# Allegro board wrsit-shynth.brd
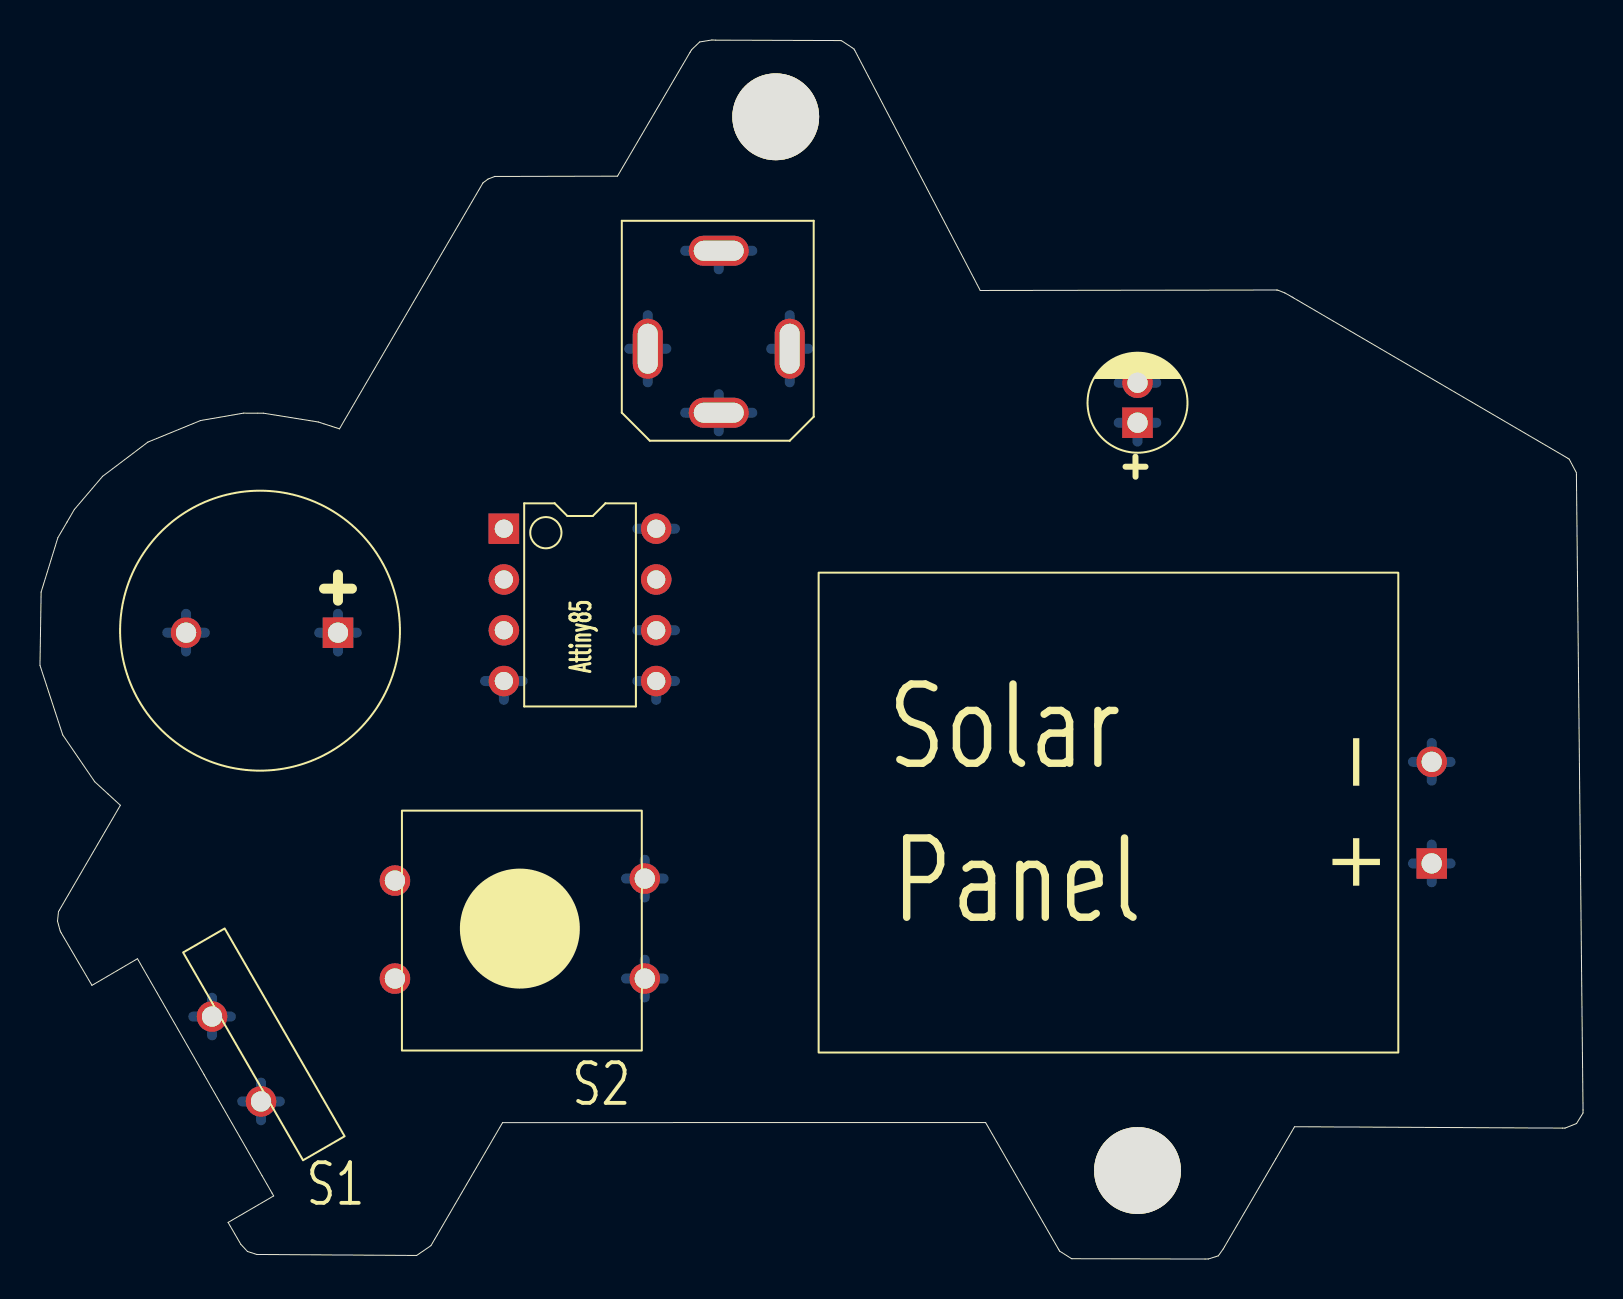
[diagram p0: board, top side]
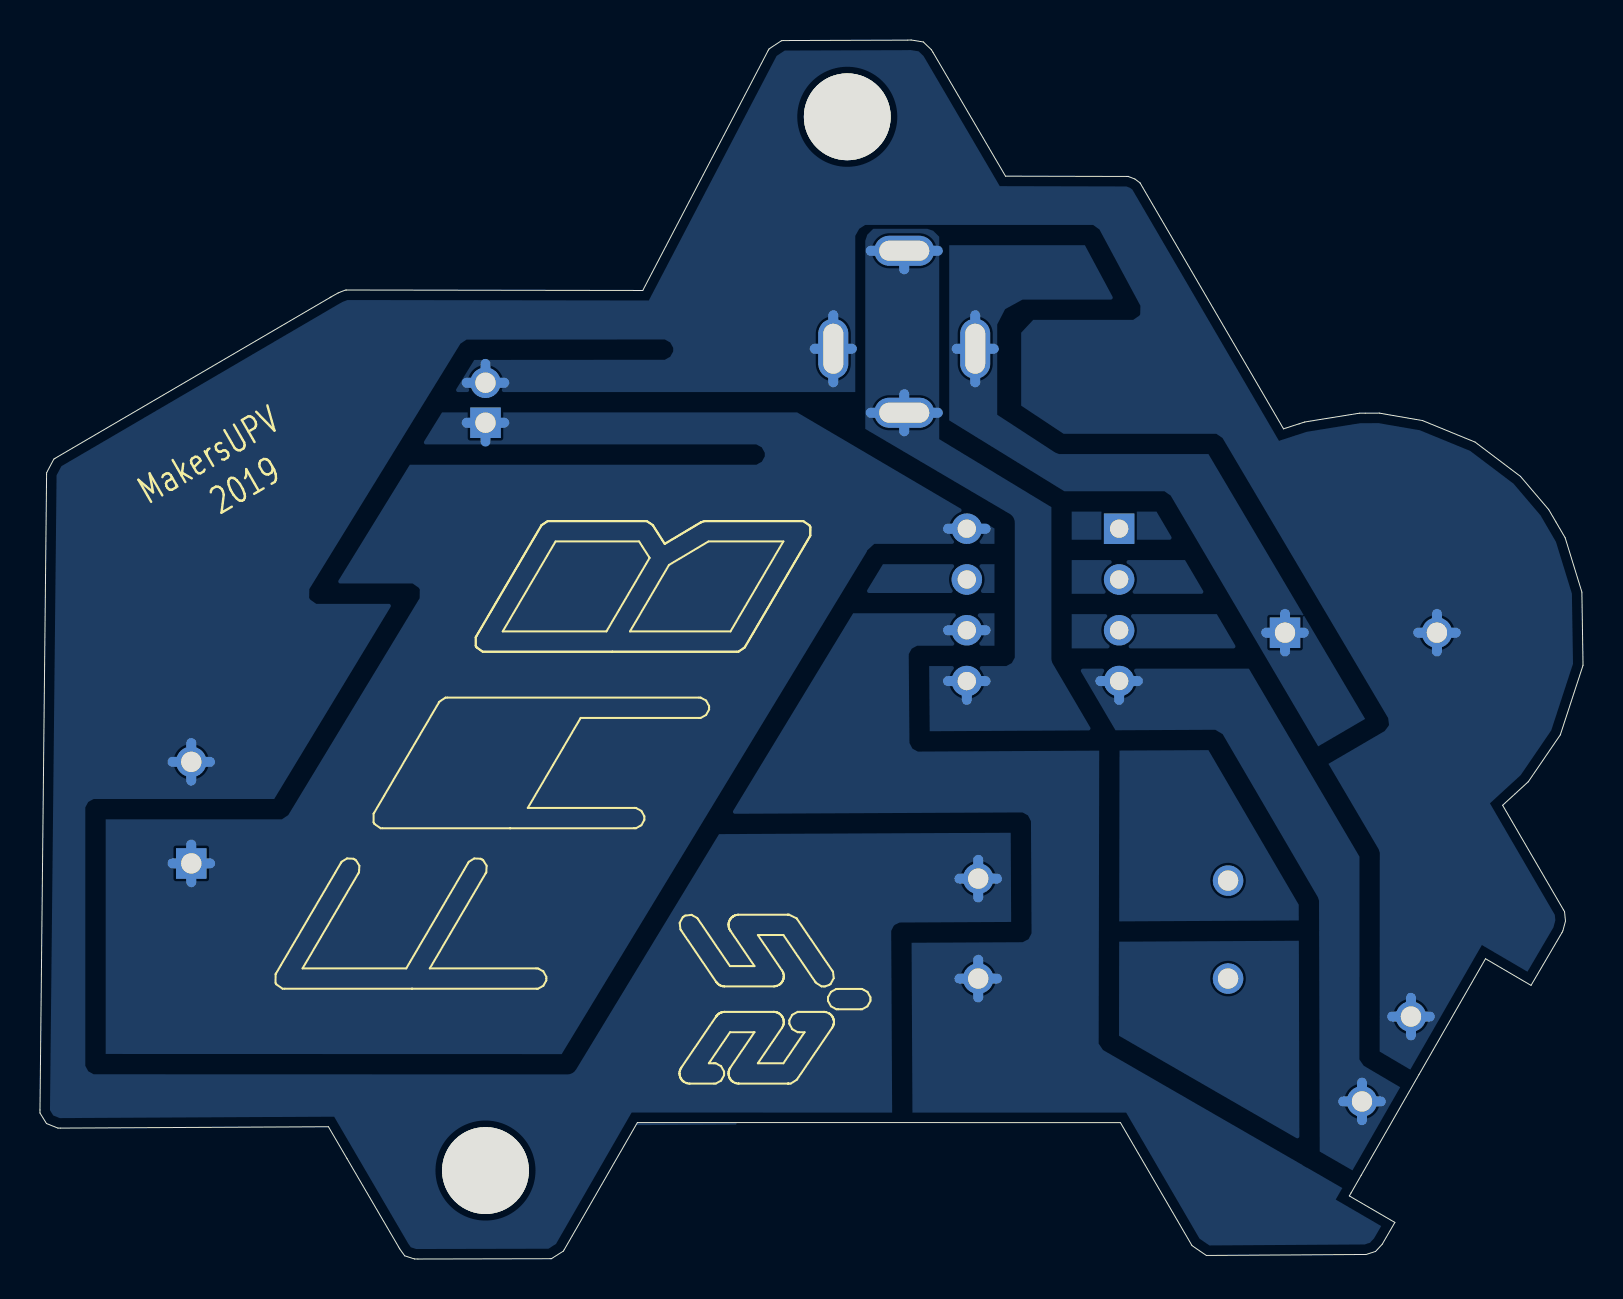
[diagram p1: board, bottom side, seen from below]

Outline 77.2 x 60.97 mm; copper layers: TOP, BOTTOM. Coordinates in mm from the lower left corner of the outline.
Outline path: 0,29.69 1.14,26.21 2.74,23.87 3.42,23.25 4.02,22.69 0.97,17.45 0.93,17.37 0.88,16.9 1.01,16.41 1.05,16.33 2.6,13.69 4.88,15.02 8.21,9.22 11.1,4.18 11.61,3.3 11.69,3.16 9.41,1.83 10.05,0.73 10.38,0.38 10.84,0.23 18.84,0.18 19.56,0.67 23.14,6.82 47.31,6.82 50.97,0.47 51.01,0.39 51.61,0.02 51.66,0.01 58.29,0 58.45,0 58.95,0.16 59.2,0.51 59.26,0.61 61.84,5.02 62.77,6.62 76.17,6.55 76.3,6.55 76.87,6.78 77.2,7.3 77.2,7.45 76.87,39.24 76.86,39.32 76.51,40 76.44,40.04 62.69,48.08 62.63,48.12 62.28,48.32 61.92,48.46 61.86,48.46 47.04,48.44 40.76,60.45 40.72,60.52 40.1,60.93 40.02,60.94 33.8,60.96 33.61,60.97 33,60.87 32.6,60.48 32.52,60.35 28.89,54.16 22.81,54.14 22.76,54.14 22.42,54.01 22.16,53.82 22.15,53.79 14.98,41.52 14.2,41.77 13.93,41.86 11.18,42.3 10.9,42.3 10.18,42.3 8.03,41.93 5.4,40.86 3.13,39.14 1.72,37.49 1.36,36.87 0.89,36.07 0.06,33.36 0,29.69

## Design rules (mm)
constraint set DEFAULT: min track width 0.127

## Placement (name value [footprint] x y rotation side)
BT1  SOLAR PANEL  [SOLAR_PANEL_29X24]  38.51 22.32 0 top
C1  100uF  [CAP5X11X2MM]  54.91 41.82 90 top
J1  JACK 3.5MM  [JACK_AUDIO_VERTICAL]  37.51 45.52 180 top
LS1  SPEAKER  [PIEZO14MM]  14.91 31.32 180 top
NOREF  -  [unnamed]  36.81 57.12 0 top
NOREF#2  -  [#2]  0.06 33.36 0 top
NOREF#3  -  [unnamed]  54.91 4.42 0 top
NOREF#4  -  [#2]  54.97 0.01 90 top
S1  SW PUSHBUTTON  [SW_4P_12X12_VERTICAL]  8.61 12.12 30 top
S2  SW PUSHBUTTON  [SW_4P_12X12]  24.01 16.52 0 top
U1  ATTINY85  [DIP8_3]  23.21 36.52 0 top

## Library data of the parts
BT1 = BATTERY
C1 = CAP POL
J1 = JACK 3.5MM
LS1 = SPEAKER
S1 = SW PUSHBUTTON_3
S2 = SW PUSHBUTTON_2
U1 = ATTINY85: Tolerance: ***; User Part Number: ***

## Footprints (pads in the part's own frame, mm; a bottom-side part is the same pattern mirrored in y, then rotated)
CAP5X11X2MM
  rect 1.524x1.524 hole 1.016: 1(0,0)
  round 1.524 hole 1.016: 2(2,0)
DIP8_3
  rect 1.524x1.524 hole 0.914: 1(0,0)
  round 1.524 hole 0.914: 2(0,-2.54) 3(0,-5.08) 4(0,-7.62) 5(7.62,-7.62) 6(7.62,-5.08) 7(7.62,-2.54) 8(7.62,0)
JACK_AUDIO_VERTICAL
  oval 1.5x3 hole 1x2.5: 1(0,0) 4(7.1,0)
  oval 3x1.5 hole 2.5x1: 2(3.55,3.2) 5(3.55,-4.9)
PIEZO14MM
  rect 1.524x1.524 hole 1.016: 1(0,0)
  round 1.524 hole 1.016: 2(7.6,0)
SOLAR_PANEL_29X24
  rect 1.524x1.524 hole 1.016: 1(31.119,-2.54)
  round 1.524 hole 1.016: 2(31.119,2.54)
SW_4P_12X12
  round 1.524 hole 1.016: 1(-6.25,2.4) 2(6.25,2.5) 3(6.25,-2.5) 4(-6.25,-2.5)
SW_4P_12X12_VERTICAL
  round 1.524 hole 1.016: 1(0,0) 2(0,-4.9)
unnamed
  round 4.343 hole 4.597 unplated: (0,0)

## Nets
GND: BT1.2(-) C1.2 J1.1 LS1.2 S1.1 S2.2
VCC: BT1.1 C1.1 U1.8(VCC)
AUD_OUT: J1.2 J1.5 U1.5
BTN: S2.3 U1.6
N15767975: J1.4 LS1.1
N15768616: S1.2 U1.4

Pads without a net: S2 1 4; U1 1 2 3 7

## Routing (per net, layer and track width the routed paths; a pad name or vN(x,y) marks a point on that pad's centre or on a via; arc(x,y) is an arc through that point)
GND: length 23.1
  BOTTOM w0.5: LS1.2 7.31,32.26 ; LS1.2 8.25,31.32 ; LS1.2 7.31,30.38 ; LS1.2 6.37,31.32 ; 30.26,18.08 S2.2 ; S2.2 30.26,19.96 ; S2.2 31.2,19.02 ; S2.2 29.32,19.02 ; 8.61,11.18 S1.1 ; S1.1 8.61,13.06 ; S1.1 7.67,12.12 ; S1.1 9.55,12.12 ; J1.1 38.44,45.52 ; J1.1 37.51,43.85 ; J1.1 36.58,45.52 ; J1.1 37.51,47.2 ; C1.2 55.85,43.82 ; C1.2 53.97,43.82 ; C1.2 54.91,44.76 ; BT1.2 70.57,24.86 ; BT1.2 69.63,25.8 ; BT1.2 69.63,23.92 ; BT1.2 68.69,24.86
VCC: length 8.5
  BOTTOM w0.5: 54.91,40.88 C1.1 ; C1.1 53.97,41.82 ; C1.1 55.85,41.82 ; BT1.1 69.63,20.72 ; BT1.1 68.69,19.78 ; BT1.1 69.63,18.84 ; BT1.1 70.57,19.78 ; 31.77,36.52 U1.8 29.89,36.52
AUD_OUT: length 12.3
  BOTTOM w0.5: J1.2 33.96,43.25 ; J1.2 35.64,42.32 ; J1.2 32.28,42.32 ; J1.2 33.96,41.4 ; 33.96,49.5 J1.5 ; J1.5 32.28,50.42 ; J1.5 35.64,50.42 ; 30.83,27.96 U1.5 ; U1.5 31.77,28.9 ; U1.5 29.89,28.9
BTN: length 5.6
  BOTTOM w0.5: 29.89,31.44 U1.6 31.77,31.44 ; 29.32,14.02 S2.3 ; S2.3 30.26,13.08 ; S2.3 30.26,14.96 ; S2.3 31.2,14.02
N15767975: length 9
  BOTTOM w0.5: LS1.1 14.91,32.26 ; LS1.1 14.91,30.38 ; LS1.1 15.85,31.32 ; LS1.1 13.97,31.32 ; 30.41,43.85 J1.4 ; J1.4 31.34,45.52 ; J1.4 29.48,45.52 ; J1.4 30.41,47.2
N15768616: length 6.6
  BOTTOM w0.5: 22.27,28.9 U1.4 ; U1.4 23.21,27.96 ; U1.4 24.15,28.9 ; S1.2 12,7.88 ; S1.2 11.06,8.82 ; S1.2 11.06,6.94 ; S1.2 10.12,7.88

## Copper pours and planes (outline as drawn; the poured copper is in the pictures)
GND on BOTTOM: 4.02,22.69 2.74,23.87 1.14,26.21 0,29.69 0.06,33.36 0.89,36.07 1.36,36.87 1.72,37.49 3.13,39.14 5.4,40.86 8.03,41.93 10.18,42.3 10.9,42.3 11.18,42.3 13.93,41.86 14.2,41.77 14.98,41.52 22.15,53.79 22.16,53.82 22.42,54.01 22.76,54.14 22.81,54.14 28.89,54.16 32.52,60.35 32.6,60.48 33,60.87 33.61,60.97 33.8,60.96 40.02,60.94 40.1,60.93 40.72,60.52 40.76,60.45 47.04,48.44 61.86,48.46 61.92,48.46 62.28,48.32 62.63,48.12 62.69,48.08 76.44,40.04 76.51,40 76.86,39.32 76.87,39.24 77.2,7.45 77.2,7.3 76.87,6.78 76.3,6.55 76.17,6.55 62.77,6.62 61.84,5.02 59.26,0.61 59.2,0.51 58.95,0.16 58.45,0 58.29,0 51.66,0.01 51.61,0.02 51.01,0.39 50.97,0.47 47.41,6.7 34.56,6.76 34.61,16.32 34.61,16.41 34.49,16.66 34.44,16.7 34.19,16.83 34.11,16.83 28.61,16.86 28.63,21.32 43.22,21.25 50.38,9.48 50.81,9.23 74.42,9.24 74.51,9.24 74.78,9.39 74.93,9.66 74.93,22.59 74.78,22.86 74.51,23.01 65.48,23.01 59.56,32.77 63.38,32.77 63.68,32.99 63.73,33.07 63.72,33.5 63.7,33.54 56.19,45.74 56.16,45.78 55.85,45.98 55.75,45.98 45.94,45.99 45.67,45.84 45.52,45.57 45.52,45.39 45.67,45.12 45.94,44.97 46.03,44.97 55.47,44.97 56.46,43.36 36.41,43.36 36.41,51.17 36.41,51.17 36.21,51.52 35.91,51.72 24.51,51.72 24.19,51.49 24.17,51.45 22.16,47.71 22.14,47.67 22.15,47.25 22.18,47.21 22.2,47.18 22.51,46.97 27.51,46.97 28.11,46.32 28.11,42.68 25.99,41.27 18.34,41.27 18.04,41.06 18.01,41.02 9.77,27.09 9.75,27.06 9.71,26.73 9.72,26.67 9.92,26.41 9.95,26.39 12.74,24.76 10.24,20.52 10.23,20.5 10.17,20.32 10.17,20.26 10.17,10.38 8.21,9.22 4.88,15.02 2.6,13.69 1.05,16.33 1.01,16.41 0.88,16.9 0.93,17.37 0.97,17.45
VCC on BOTTOM: 64.75,22.23 64.78,22.2 65.09,21.99 73.91,21.99 73.91,10.25 51.1,10.25 35.83,35.38 35.82,35.44 35.46,35.77 29.44,35.77 29.44,36.54 39.32,42.34 57.08,42.34 58.07,40.74 41.35,40.74 41.09,40.59 40.94,40.32 40.94,40.14 41.09,39.87 41.35,39.72 58.7,39.72 62.35,33.78 58.55,33.78 58.24,33.57 58.19,33.49 58.2,33.05 58.22,33.01
AUD_OUT on BOTTOM: 35.91,50.92 35.91,41.52 28.68,37.27 28.43,30.07 28.58,29.81 28.85,29.66 32.71,29.66 32.68,26.4 24.57,26.44 26.53,29.77 26.6,37.6 32.21,41 32.21,51.12 32.51,51.42 32.81,51.52 35.51,51.52 35.81,51.22
BTN on BOTTOM: 11.61,3.3 13.79,4.56 13.82,4.57 14.03,4.69 14.05,4.71 23.98,10.43 24.02,10.46 24.23,10.77 24.23,10.87 24.2,25.42 33.19,25.38 33.28,25.38 33.55,25.53 33.7,25.81 33.7,25.88 33.73,30.12 33.73,30.16 33.73,30.26 33.58,30.52 33.31,30.67 29.44,30.67 29.44,32.29 36.52,32.29 42.61,22.27 28.04,22.33 27.77,22.19 27.62,21.9 27.62,21.83 27.59,16.36 27.59,16.29 27.74,16 28.03,15.85 28.1,15.84 33.59,15.82 33.54,6.77 23.14,6.82 19.56,0.67 19.52,0.6 18.84,0.18 18.76,0.17 10.98,0.23 10.84,0.23 10.38,0.38 10.05,0.73 9.98,0.84 9.41,1.83 11.69,3.16
Net_7 on BOTTOM: 25.58,30.54 17.31,30.54 18.32,32.25 25.58,32.25
Net_8 on BOTTOM: 25.58,33.27 18.92,33.27 19.91,34.96 25.58,34.96
Net_9 on BOTTOM: 25.58,37.38 25.58,35.97 20.51,35.97 21.34,37.38
Net_10 on BOTTOM: 23.21,11.17 14.19,5.96 14.22,15.92 23.21,15.87
Net_11 on BOTTOM: 18.74,25.45 23.19,25.43 23.2,16.89 14.22,16.93 14.22,17.72
Net_12 on BOTTOM: 35.9,33.31 29.44,33.31 29.44,34.75 35.02,34.75
N15767975 on BOTTOM: 23.46,47.98 24.92,50.7 31.71,50.7 31.71,41.94 25.95,38.4 20.94,38.4 20.63,38.19 20.61,38.15 13.25,25.64 10.9,27.01 18.74,40.26 26.21,40.26 26.4,40.33 26.42,40.34 29.31,42.22 29.31,46.74 28.91,47.5 28.04,47.98
N15768616 on BOTTOM: 16.71,29.52 25.2,29.52 23.39,26.44 18.48,26.47 18.4,26.47 18.03,26.26 18.01,26.22 13.28,18.11 13.26,18.1 13.21,17.92 13.21,17.86 13.2,16.4 13.17,5.38 11.1,4.18 8.71,8.34 10.94,9.65 10.98,9.67 11.19,9.98 11.19,10.09 11.18,20.12

## Text on the board
Ref Des/Silkscreen Bottom: 2019 | MakersUPV
Ref Des/Silkscreen Top: Attiny85 | Solar | Panel
DEVICE_TYPE_TOP: FIGURE | FINISHED_SIZE | 0.9144 | 1.016 | 4.5974 | 2.5x1.0 | DRILL CHART: TOP to BOTTOM | ALL UNITS ARE IN MILLIMETERS | PLATED | NON-PLATED | QTY | 8 | 3 | 9 | 2
